# Altium PCB STM32.PcbDoc
Units mil, origin at the board's own origin, x right, y up, seen from the top; angles counter-clockwise.
Board outline 6000 x 4000 mil, 2 copper layers (Top Layer, Bottom Layer); 62 components, 102 nets, 332 pads, 38 vias.
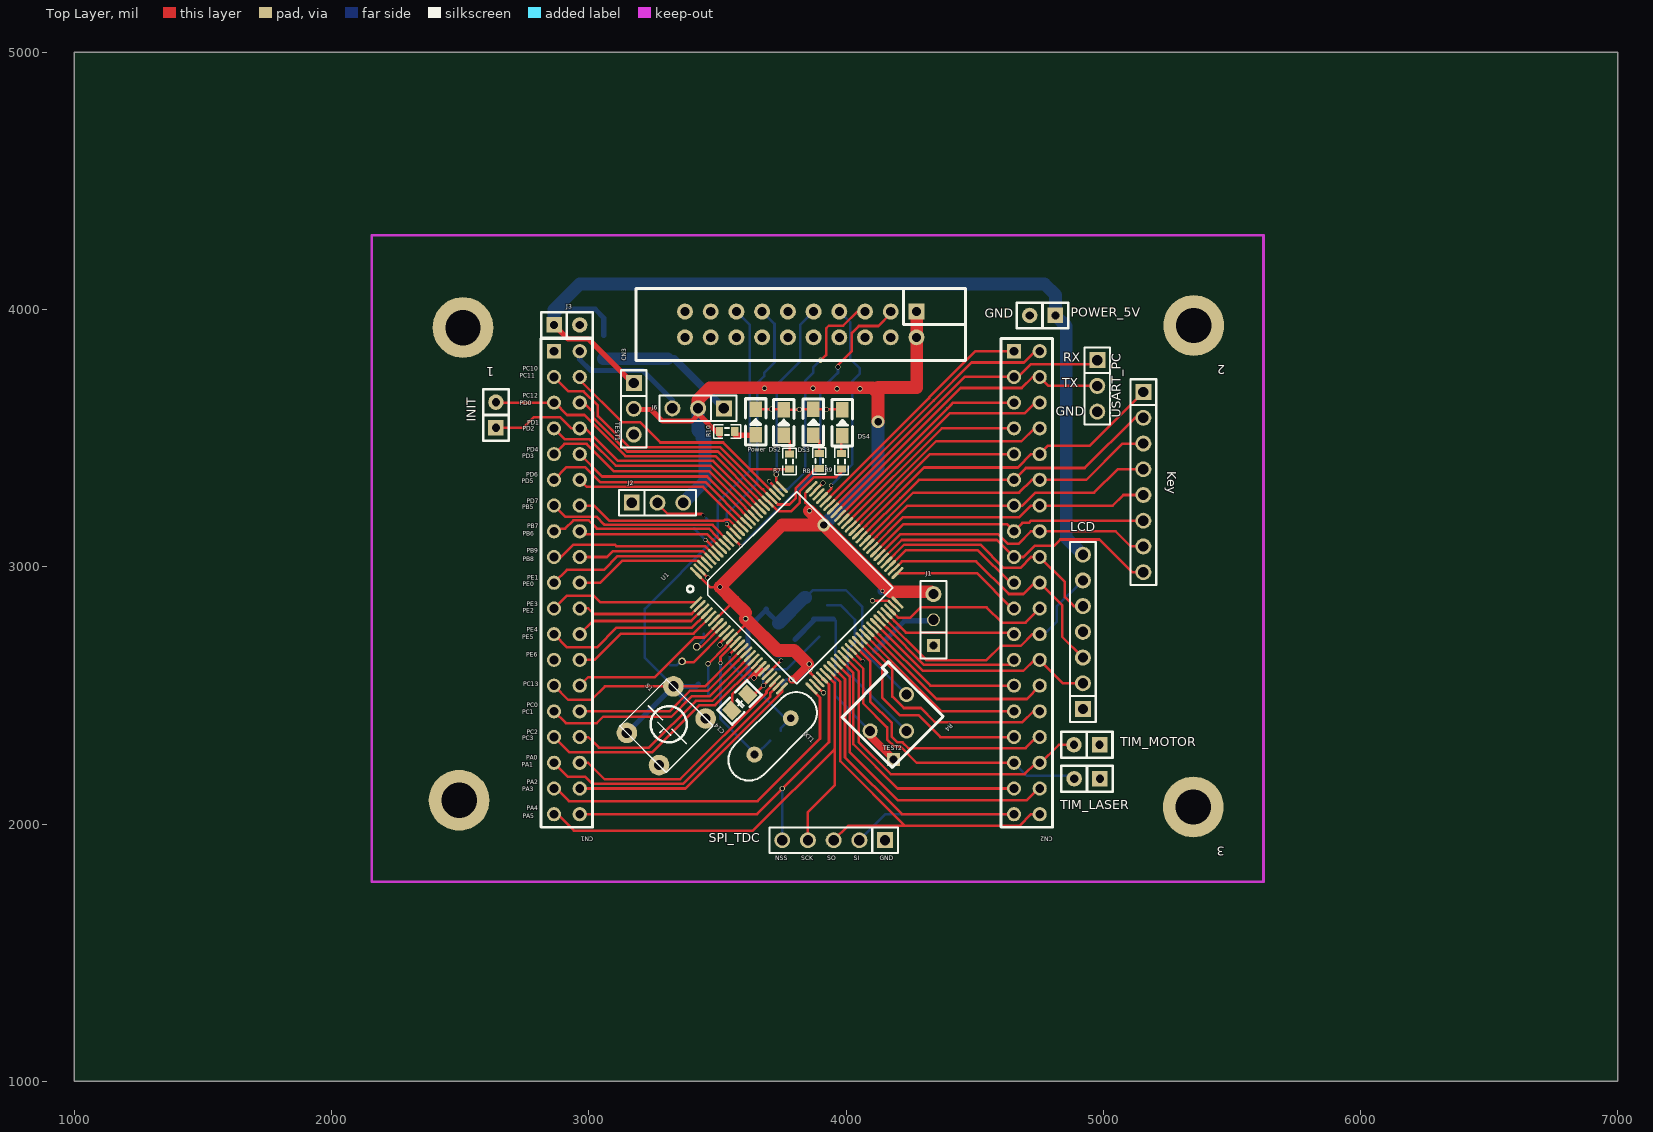
[diagram p0: Top Layer view]
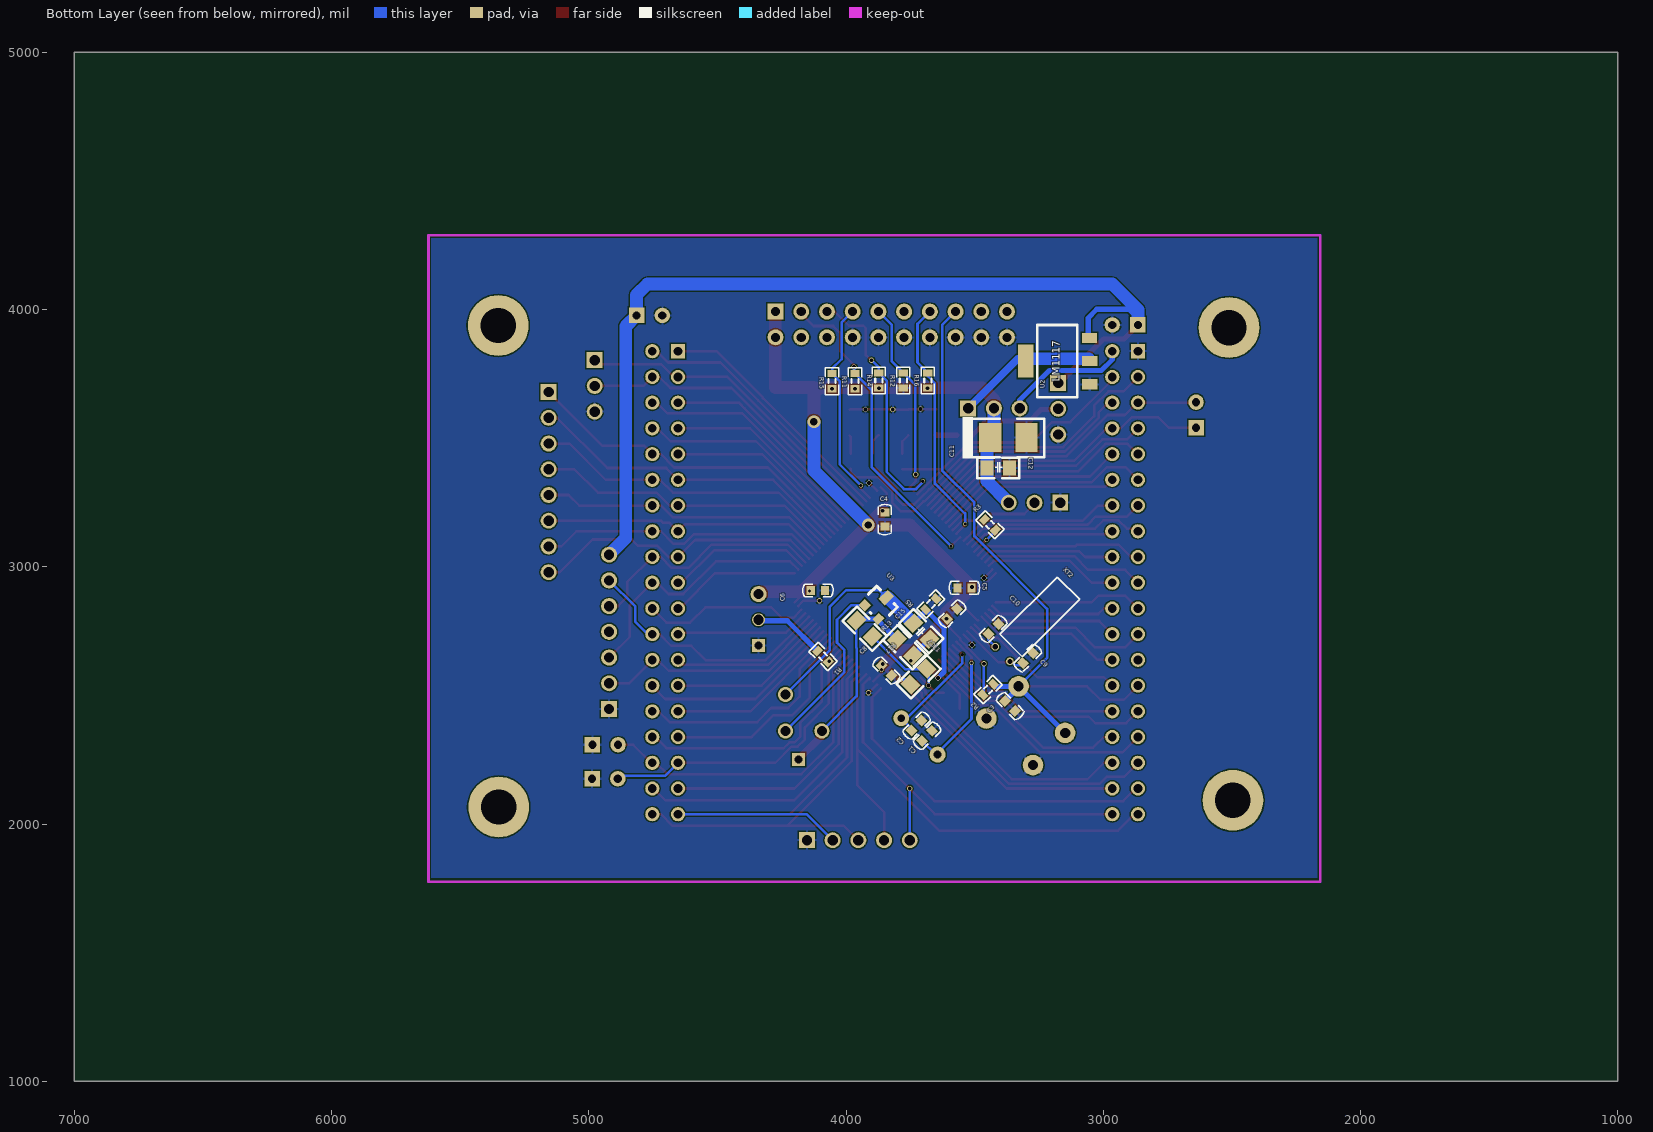
[diagram p1: Bottom Layer view, seen from below]

## Layer stack, top to bottom
Top Layer: signal copper 1.4
Dielectric: dielectric 12.6, FR-4, Dk 4.8
Bottom Layer: signal copper 1.4

## Board outline
1000,1000 7000,1000 7000,5000 1000,5000

## Design rules (kind name [scope] priority, off if disabled: settings)
Clearance [All] p1: gap=5
HoleToHoleClearance [All] p1: gap=6 allowstackedmicrovias=TRUE
MinimumSolderMaskSliver [All] p1: minsoldermaskwidth=6
PolygonConnect [All] p1: connectstyle=Relief reliefconductorwidth=10 reliefentries=4 polygonreliefangle="90 Angle"
RoutingVias [All] p1: holewidth=15 width=20 viastyle="Through Hole" minholewidth=13 minwidth=15 maxholewidth=28 maxwidth=50
SilkToSilkClearance [All] p1: silktosilkclearance=0
SilkscreenOverComponentPads [All] p1: minsilkscreentomaskgap=-10
SolderMaskExpansion [All] p1: expansion=4
TestPointUsage FabricationTestPointUsage [All] p1: valid=0 allowmultiple=FALSE
Testpoint FabricationTestpoint [All] p1: side=3 testpointundercomponent=TRUE minsize=40 maxsize=100 preferedsize=60 minholesize=0 maxholesize=40 preferedholesize=32 testpointgrid=1 style=297 order=0123456789
Width [All] p1: maxlimit=50 minlimit=10 preferedwidth=10
20 further rules are at their usual default settings.

## Components (designator, comment, footprint, x,y, rotation, side; value= is the part's Value field where it differs from the comment)
1 "" "gudingkong(3.5mm) - duplicate" 2511,3930 r180 top
2 "" "gudingkong(3.5mm) - duplicate" 5352,3938 r180 top
3 "" "gudingkong(3.5mm) - duplicate" 5350,2066 r180 top
C1 "20pF" 0603C 3662,2366 r315 bottom
C2 "20pF" 0603C 3703,2406 r315 bottom
C3 "100nF" 0603C 3339,2436 r45 bottom
C4 "100nF" 0603C 3849,3151 r90 bottom
C5 "100nF" 0603C 3572,2918 r180 bottom
C6 "100nF" 0603C 4077,2908 r0 bottom
C7 "100nF" 0603C 3565,2840 r315 bottom
C8 "100nF" 0603C 3820,2574 r45 bottom
C9 "10pF" 0603C 3316,2622 r135 bottom
C10 "10pF" 0603C 3450,2735 r135 bottom
C11 "100uF" 3528C(1210) 3439,3502.2 r0 bottom
C12 "10uF" 0805C 3450,3382 r180 bottom
C14 "10nF" 0805C 3615,2504 r225 top
C15 "10nF" 0805C 3676,2721 r45 bottom
CN1 "HEADER 19X2" DIP38 2865,3838 r270 top
CN2 "HEADER 19X2" DIP38 4653,3838 r270 top
CN3 "JTAG" IDC20_W 4274,3992 r180 top
DS2 "LED" 0805D 3758,3561 r90 top
DS3 "LED" 0805D 3873,3562 r90 top
DS4 "LED" 0805D 3986,3560 r90 top
INIT "SIP2" SIP2-2.54 2639,3540 r90 top
J1 "BOOT1" SIP3-2.54#1 4340,2693.82 r90 top
J2 "BOOT0" SIP3-2.54#2 3167.18,3249 r0 top
J3 "POWER" SIP2-2.54 2865,3940 r0 top locked
J6 "SIP3" SIP3-2.54#2 3525,3615.82 r180 top
Key "SIP8" SIP8-2.54 5156,3679 r270 top
L1 "" 0805R 3753.31,2538.29 r135 bottom
LCD "SIP7" SIP7-2.54 4804,2327 r90 top
Power "LED" 0805D 3649,3563 r90 top
POWER_5V "SIP2" SIP2-2.54 4814,3977 r180 top
R1 "10K" 0603R 4089,2651 r225 bottom
R2 "10K" 0603r 3448,2522.18 r315 bottom
R3 "10K" 0603r 3441,3164 r45 bottom
R4 "RPot_1" VR4B 4235.42,2503.28 r225 top
R5 "0" 0603r 3671,2854 r315 bottom
R7 "510" 0603R 3781,3410 r90 top
R8 "510" 0603R 3896,3412 r90 top
R9 "510" 0603R 3982,3411 r90 top
R10 "510" 0603R 3539,3526 r0 top
R11 "10K" 0603R 3965,3720.48 r270 bottom
R12 "10K" 0603R 3777.25,3725.48 r90 bottom
R13 "47" 0805R 3735,2651 r45 bottom
R14 "10K" 0603R 3872.5,3723.48 r270 bottom
R15 "10K" 0603R 4053.75,3720.48 r270 bottom
R16 "10K" 0603R 3682,3723.48 r270 bottom
R17 "39" 0805R 3963,2795 r225 bottom
S1 "SW-PB" KEY_4PIN 3273.19,2229 r45 top
SPI_TDC "SIP5" SIP5-2.54 4152,1937 r180 top
TEST1 "SIP3" SIP3-2.54#2 3175,3714 r270 top
TEST2 "SIP1" SIP1 4180,2251 r90 top
TIM_LASER "SIP2" SIP2-2.54 4987,2176 r180 top
TIM_MOTOR "SIP2" SIP2-2.54 4986,2308 r180 top
U1 "STM32F103VBH6" LQFP-100 3821,2924.28 r45 top
U2 "LM1117-3.3" lm1117 3176.5,3789.82 r90 bottom
U3 "TL431" SOT-23 3875.76,2969.28 r225 bottom
USART_PC "SIP3" SIP3-2.54#2 4977,3803 r270 top
XT1 "crastal" HC-49S 3644,2269.87 r45 top locked
XT2 "crastal" AT38 3362.81,2632.3 r135 bottom
? "" "gudingkong(3.5mm) - duplicate" 2496,2092 r180 top

## Footprints (in the part's own frame and the unit in brackets; to place one, negate y for a bottom-side part, rotate by r counter-clockwise, add the part's x,y. Pads: shape width x height; smd on the part's side, far side on the other; paste and mask are expansions set on the pad)
0603C [mm]
  rect 0.8x0.9 smd: 1(0.127,0) 2(1.527,0)
  silkscreen extent -0.69,-0.61 2.32,0.64, body extent -0.05,-0.48 1.7,0.47, height 0.85
0603R [mm]
  rect 0.7x0.9 smd: 1(-0.775,0) 2(0.725,0)
  silkscreen extent -1.35,-0.66 1.3,0.66, body extent -0.88,-0.48 0.82,0.48, height 0.6
0603r [mm]
  rect 0.7x0.9 smd: 1(-0.775,0) 2(0.725,0)
  silkscreen extent -1.35,-0.66 1.3,0.66, body extent -0.88,-0.48 0.82,0.48, height 0.6
0805C [mil]
  rect 51.21x59.06 smd: 1(-2,2) 2(86,2)
  silkscreen extent -39,-38 124,42
0805D [mil]
  rect 60x49.21 smd: A(-50,0) K(50,0)
  silkscreen extent -90,-40 90,40
0805R [mil]
  rect 51.21x59.06 smd: 1(6,0) 2(94,0)
  silkscreen extent -31,-40 132,40
3528C(1210) [mm]
  rect 2.2x2.85 smd: 1(0,0) 2(-3.581,0)
  silkscreen extent -5.33,-2.01 2.74,2.06
AT38 [mil] "直径为3mm，长度为8mm晶振"
  round 30 hole 20: 1(0,0) 2(0,80.31)
  silkscreen extent 45,-21 362,101
DIP38 [mil]
  rect 55x55 hole 34: 1(0,0)
  round 55 hole 34: 2(0,100) 3(100,0) 4(100,100) 5(200,0) 6(200,100) 7(300,0) 8(300,100) 9(400,0) 10(400,100) 11(500,0) 12(500,100) 13(600,0) 14(600,100) 15(700,0) 16(700,100) 17(800,0) 18(800,100) 19(900,0) 20(900,100) 21(1000,0) 22(1000,100) 23(1100,0) 24(1100,100) 25(1200,0) 26(1200,100) 27(1300,0) 28(1300,100) 29(1400,0) 30(1400,100) 31(1500,0) 32(1500,100) 33(1600,0) 34(1600,100) 35(1700,0) 36(1700,100) 37(1800,0) 38(1800,100)
  silkscreen extent -50,-50 1850,150
"gudingkong(3.5mm) - duplicate" [mm]
  round 6 hole 3.5: 0(0,0)
HC-49S [mil]
  round 62 hole 30: 1(0,0) 2(200,0)
  silkscreen extent -110,-80 310,80
IDC20_W [mil]
  rect 62x62 hole 35.43: 1(0,0)
  round 62 hole 35.43: 2(0,100) 3(100,0) 4(100,100) 5(200,0) 6(200,100) 7(300,0) 8(300,100) 9(400,0) 10(400,100) 11(500,0) 12(500,100) 13(600,0) 14(600,100) 15(700,0) 16(700,100) 17(800,0) 18(800,100) 19(900,0) 20(900,100)
  silkscreen extent -190,-90 1090,190
KEY_4PIN [mil]
  round 80 hole 40: 1(0,0) 1(256,0) 2(0,177) 2(256,177)
  silkscreen extent 0,-40 256,215
lm1117 [mm]
  rect 1x1.5 smd: 1(-2.043,-3.148) 2(0.256,-3.148) 3(2.53,-3.123)
  rect 3.3x1.549 smd: 4(0.254,3.175)
  silkscreen extent -3.3,-1.91 3.81,2.03
LQFP-100 [mil]
  rect 62x11.02 smd: 1(-330,241)
  oval 62x11.02 smd: 2(-330,221.32) 3(-330,201.63) 4(-330,181.95) 5(-330,162.26) 6(-330,142.57) 7(-330,122.89) 8(-330,103.2) 9(-330,83.52) 10(-330,63.83) 11(-330,44.15) 12(-330,24.46) 13(-330,4.78) 14(-330,-14.91) 15(-330,-34.59) 16(-330,-54.28) 17(-330,-73.96) 18(-330,-93.65) 19(-330,-113.33) 20(-330,-133.01) 21(-330,-152.7) 22(-330,-172.38) 23(-330,-192.07) 24(-330,-211.76) 25(-330,-231.44) 51(303.87,-231.44) 52(303.87,-211.76) 53(303.87,-192.07) 54(303.87,-172.38) 55(303.87,-152.7) 56(303.87,-133.01) 57(303.87,-113.33) 58(303.87,-93.65) 59(303.87,-73.96) 60(303.87,-54.28) 61(303.87,-34.59) 62(303.87,-14.91) 63(303.87,4.78) 64(303.87,24.46) 65(303.87,44.15) 66(303.87,63.83) 67(303.87,83.52) 68(303.87,103.2) 69(303.87,122.89) 70(303.87,142.57) 71(303.87,162.26) 72(303.87,181.95) 73(303.87,201.63) 74(303.87,221.32) 75(303.87,241)
  oval 11.02x62 smd: 26(-249.28,-312.16) 27(-229.6,-312.16) 28(-209.91,-312.16) 29(-190.23,-312.16) 30(-170.54,-312.16) 31(-150.86,-312.16) 32(-131.17,-312.16) 33(-111.49,-312.16) 34(-91.8,-312.16) 35(-72.12,-312.16) 36(-52.43,-312.16) 37(-32.75,-312.16) 38(-13.06,-312.16) 39(6.62,-312.16) 40(26.31,-312.16) 41(45.99,-312.16) 42(65.68,-312.16) 43(85.36,-312.16) 44(105.05,-312.16) 45(124.73,-312.16) 46(144.42,-312.16) 47(164.1,-312.16) 48(183.79,-312.16) 49(203.47,-312.16) 50(223.16,-312.16) 76(223.16,321.72) 77(203.47,321.72) 78(183.79,321.72) 79(164.1,321.72) 80(144.42,321.72) 81(124.73,321.72) 82(105.05,321.72) 83(85.36,321.72) 84(65.68,321.72) 85(45.99,321.72) 86(26.31,321.72) 87(6.62,321.72) 88(-13.06,321.72) 89(-32.75,321.72) 90(-52.43,321.72) 91(-72.12,321.72) 92(-91.8,321.72) 93(-111.49,321.72) 94(-131.17,321.72) 95(-150.86,321.72) 96(-170.54,321.72) 97(-190.23,321.72) 98(-209.91,321.72) 99(-229.6,321.72) 100(-249.28,321.72)
  silkscreen extent -321,-259 251,306
SIP1 [mil]
  rect 50x50 hole 30: 1(0,-5)
SIP2-2.54 [mil]
  rect 60x60 hole 32: 1(0,0)
  round 60 hole 32: 2(100,0)
  silkscreen extent -50,-50 150,50
SIP3-2.54#1 [mil]
  rect 50x50 hole 30: 1(0,0)
  round 50 hole 40: 2(100,0)
  round 62 hole 40: 3(200,0)
  silkscreen extent -50,-50 250,50
SIP3-2.54#2 [mil]
  rect 62x62 hole 40: 1(0,0)
  round 62 hole 40: 2(100,0) 3(200,0)
  silkscreen extent -50,-50 250,50
SIP5-2.54 [mil]
  rect 62x62 hole 40: 1(0,0)
  round 62 hole 40: 2(100,0) 3(200,0) 4(300,0) 5(400,0)
  silkscreen extent -50,-50 450,50
SIP7-2.54 [mil]
  rect 62x62 hole 40: 1(120,-117)
  round 62 hole 40: 2(220,-117) 3(320,-117) 4(420,-117) 5(520,-117) 6(620,-117) 7(720,-117)
  silkscreen extent 70,-167 770,-67
SIP8-2.54 [mil]
  rect 62x62 hole 40: 1(0,0)
  round 62 hole 40: 2(100,0) 3(200,0) 4(300,0) 5(400,0) 6(500,0) 7(600,0) 8(700,0)
  silkscreen extent -50,-50 750,50
SOT-23 [mil]
  rect 36x36 smd: 1(47.76,-120.28)
  rect 30x36 smd: 2(122.76,-120.28)
  rect 36x50 smd: 3(85.76,-40.28)
  silkscreen extent 28,-125 143,-35
VR4B [mm]
  round 1.5 hole 1: 1(0,0) 2(5.08,0) 3(2.54,2.54)
  silkscreen extent -1.02,-3.58 6.1,4.09

## Part data
C1 C2 C3 C4 C5 C6 C7 C8: library part Cap1, "SMD-CAP"
C9 C10: library part CAP, "Capacitor"
C11: library part Cap-T, "钽电容"
C12: library part "Cap Pol3", "Polarized Capacitor (Surface Mount)"
C14 C15: library part Cap, "Capacitor"
CN3: library part "Header 10X2", "Header, 10-Pin, Dual row"
INIT J6 Key LCD POWER_5V SPI_TDC TEST1 TIM_LASER TIM_MOTOR USART_PC: "jointbar"
J1 J2: library part SIP3, "jointbar"
J3: library part SIP2, "jointbar"
L1: library part L1
R1 R7 R8 R9 R10 R11 R12 R13 R14 R15 R16 R17: library part "RES Semi", "Resistor"
R2 R3 R5: library part res1, "Resistor"
R4: "Potentiometer"
S1: "Switch"
TEST2: "Variable Resistor"
U2: "800mA and 1A Low Dropout Positive Regulator 2.85V, 3.3V, 5V, and Adjustable"
U3: "IC"
XT1 XT2: library part XT, "晶振"

## Via types
v1: diameter 20, hole 15, Top Layer to Bottom Layer, 24 vias
v2: diameter 15, hole 13, Top Layer to Bottom Layer, 11 vias
v3: diameter 50, hole 28, Top Layer to Bottom Layer, 2 vias
v4: diameter 15, hole 13, Bottom Layer to Top Layer, 1 vias

## Nets (pads, with @x,y where several pads share a name; then routed paths per layer and width w, separated by ;. In a path a pad name is that pad's centre, name@x,y a point inside that pad or via, vN(x,y) a via of type N, cw(c..) or ccw(c..) an arc to the next point about the centre after c; other vN are vias at no path point)
+3V3: C4.2 C5.2 C6.2 C7.2 C8.2 C11.1 C12.1 CN3.1 CN3.2 J1.3 J2.3 J6.2 L1.1 R2.2 R10.1 R11.2 R14.2 R15.2 R16.2 TEST1.2 U1.6 U1.11 U1.28 U1.50 U1.75 U1.100 | length 5182.8
  Top Layer w10: U1.100 3471.72,2921 v1(3510,2921) ; v1(3464,2623) 3465.28,2623 3530,2687.72 3530,2689.82 3556.44,2716.26 U1.11 3621.14,2786.86 ; U1.6 3488.75,2791.75 3564,2867 ; v1(3858,3218) 3858,3233.27 3841.92,3249.35 3841.92,3286.03 U1.75 ; v2(3862,2599) 3862,2586.42 U1.28 ; 4154.87,2906 U1.50
  Top Layer w20: TEST1.2@3174,3611 3242,3611 3287,3566 3400,3566 J6.2@3425,3591 ; J6.2 3425,3595.47 R10.1@3509.47,3511
  Top Layer w30: v1(3788.86,2561.86) 3796.86,2561.86 v1(3857,2622)
  Top Layer w50: J6.2 3425,3649 3472,3696 4104,3696 4125,3675 ; v1(3610,2798) 3621.14,2786.86 3733,2675 3798,2675 v1@3851,2622 ; 3610,2821 3564,2867 v1(3510,2921) 3751.5,3162.5 v3(3913.5,3162.5) ; v1(3858,3218) v3(3913.5,3162.5) ; v3(4125,3564) 4125,3675 ; CN3.1@4275,3986 4275,3697 4125,3697 4125,3675 ; J1.3 4330.82,2903 4173,2903 v3(3913.5,3162.5)
  Bottom Layer w10: v1(3464,2623) 3464,2506.18 R2.2 ; L1.1 3768.4,2561.86 v1(3788.86,2561.86)
  Bottom Layer w30: C6.2@4137.12,2906 C6.2
  Bottom Layer w50: J2.3 3452,3333.82 C12.1 3452,3489.2 C11.1 ; J6.2 3425,3529.2 C11.1@3453,3501.2 ; v3(3913.5,3162.5) 4124,3373 v3@4124,3563
  other v1: 3965,3691.95 4053.75,3691.95 3683,3694 3872,3694
  other v2: 4142,2906
+5V: J3.1 LCD.7 POWER_5V.1 TEST1.1 U2.3 | length 3815.9
  Top Layer w20: J3.1 2919.5,3885.5 2999.5,3885.5 TEST1.1@3174,3711
  Bottom Layer w20: J3.1 2865,3966 2900,4001 3025,4001 3058.53,3967.47 U2.3@3058.53,3898.44
  Bottom Layer w50: J3.1@2865,3966 2865,3999 2965,4099 4772,4099 4814,4057 POWER_5V.1 4856,3935 4856,3112 LCD.7
AREF_IN: R4.2 R13.2 R17.1 TEST2.1 U3.2 | length 829.6
  Top Layer w30: R4.2 4094,2342 TEST2.1
  Bottom Layer w10: R17.1@3952.09,2797.43 R17.1 3960,2789.51 3960,2685 3959,2684 3959,2496.86 R4.2
  Bottom Layer w20: R13.2 U3.2@3877.72,2793.72 ; U3.2 R17.1@3952.09,2797.43
EVCC: CN3.19
GND: C1.1 C2.1 C3.1 C4.1 C5.1 C6.1 C7.1 C8.1 C9.2 C10.2 C11.2 C12.2 CN1.1 CN3.8 CN3.10 CN3.12 CN3.14 CN3.16 CN3.18 CN3.20 DS2.K DS3.K DS4.K J1.1 J2.1 J3.2 LCD.1 Power.K POWER_5V.2 R5.1 R12.1 S1.1 SPI_TDC.1 TEST1.3 TIM_LASER.1 TIM_MOTOR.1 U1.10 U1.27 U1.49 U1.74 U1.99 U2.1 USART_PC.3 | length 619.8
  Top Layer w10: U1.99 3463.58,2957 v1(3464,2957) ; v1(3510,2696) 3510,2703.56 U1.10 ; Power.K v1(3710,3613) 3756,3613 DS2.K v1(3818,3611) 3819,3612 DS3.K v1(3924,3612) 3984,3612 DS4.K ; U1.27 3880.79,2541.21 v1(3912,2510) ; U1.74 3909.73,3326 v1(3911,3326) ; v1(4103,2868) 4165.04,2868 U1.49
NetC1_2: C1.2 U1.12 XT1.1 | length 596
  Top Layer w10: v2(3512,2626) 3512,2648.5 3551.82,2688.32 3551.82,2689.82 3570.24,2708.24 U1.12
  Bottom Layer w10: v2(3512,2626) 3512,2408.77 3650.89,2269.87 C1.2
NetC15_1: C15.1 R13.1 U1.21 | length 163.2
  Top Layer w10: U1.21 3747.67,2635 v2(3748,2635)
  Bottom Layer w20: C15.1 3676.31,2718.17 R13.1
NetDS2_A: DS2.A R7.2 | length 82
  Top Layer w10: DS2.A 3781,3488 R7.2
NetDS3_A: DS3.A R8.2 | length 81
  Top Layer w10: DS3.A 3896,3489 R8.2
NetDS4_A: DS4.A R9.2 | length 72.1
  Top Layer w10: R9.2 3982,3506 DS4.A
NetJ1_2: J1.2 R1.1 | length 279.6
  Bottom Layer w20: R1.1 4228,2790 4336.18,2790 J1.2
NetJ2_2: J2.2 R3.2 | length 233.8
  Top Layer w10: J2.2 3267.18,3244.82 3307,3205 3440,3205 v2(3445,3200)
  Bottom Layer w10: J2.2@3264.18,3229.82 3267.18,3226.82 J2.2 ; R3.2@3456.34,3189 R3.2
NetJ6_1: J6.1 U2.2 U2.4 | length 547.4
  Bottom Layer w30: U2.4@3306.5,3808.82 3332,3808.82 J6.1
  Bottom Layer w50: U2.2@3057.55,3808.9 3306.42,3808.9 U2.4@3306.5,3808.82
NetPower_A: Power.A R10.2 | length 81.3
  Top Layer w20: R10.2@3568.53,3511 3647,3511 Power.A
NetR3_1: R3.1 U1.94 | length 130.3
  Top Layer w10: v2(3453.22,3104) 3455.78,3104 U1.94
  Bottom Layer w10: R3.1@3410.41,3150.41 3410.41,3146.81 v2(3453.22,3104)
NetR4_3: R4.3 U3.1 | length 670.5
  Bottom Layer w10: U3.1 3978.54,2850.46 4035,2794 4035,2705 4006,2676 4006,2591.28 R4.3
OSC_OUT: C2.2 U1.13 XT1.2 | length 474
  Top Layer w10: v2(3548,2658) U1.13
  Bottom Layer w10: v2(3548,2658) 3548,2626 3762.71,2411.29 XT1.2 3745.51,2371.38 C2.2
PA0: CN1.34 U1.23 | length 950.3
  Top Layer w10: CN1.34 2998,2238 3062,2174 3355,2174 3691,2510 3691,2516.75 3723.47,2549.22 U1.23
PA1: CN1.33 U1.24 | length 1077.6
  Top Layer w10: CN1.33@2865,2241 CN1.33 2920,2183 2987,2183 3014,2156 3367,2156 3706,2495 3706,2509.82 U1.24
PA2: CN1.36 U1.25 | length 955.7
  Top Layer w10: CN1.36 3376,2138 3751.31,2513.31 U1.25
PA3: CN1.35 U1.26 | length 1364.1
  Top Layer w10: CN1.35 2874,2138 2923,2089 3656,2089 3899,2332 3899,2491.89 3865.46,2525.43 U1.26
PA4: CN1.38 SPI_TDC.5 U1.29 | length 1579
  Top Layer w10: CN1.38 3654,2038 3934,2318 3934,2542.26 U1.29 U1.29@3907.22,2563.14
  Bottom Layer w10: SPI_TDC.5@3727,1937 SPI_TDC.5 v1(3752,2138)
PA5: CN1.37 SPI_TDC.4 U1.30 | length 1950.6
  Top Layer w10: CN1.37 2878,2038 2942,1974 3638,1974 3954.5,2290.5 ; SPI_TDC.4 3852,2046 3956,2150 3956,2548.1 U1.30
PA6: CN2.38 SPI_TDC.3 U1.31 | length 1548.2
  Top Layer w10: U1.31@3948,2582 3978,2552 3978,2244 4229,1993 ; SPI_TDC.3 4008,1993 4229,1993 ; CN2.38 4720,2038 4675,1993 4229,1993
PA7: CN2.37 SPI_TDC.2 U1.32 | length 1762.7
  Top Layer w10: U1.32 3996,2563.78 3996,2259 4217,2038 CN2.37
  Bottom Layer w10: SPI_TDC.2 4153,2038 CN2.37
PA8: CN2.5 U1.67 | length 858.4
  Top Layer w10: U1.67 4394.6,3616 4408.3,3629.7 4416.6,3638 CN2.5
PA9: CN2.4 U1.68 USART_PC.2 | length 1246.4
  Top Layer w10: U1.68 4445.76,3695 4683,3695 4726,3738 CN2.4 4788,3703 USART_PC.2
PA10: CN2.3 U1.69 USART_PC.1 | length 1267
  Top Layer w10: U1.69 4358.92,3636 4404.46,3681.54 4460.92,3738 CN2.3 4669,3738 4719,3788 4962,3788 USART_PC.1
PA11: CN2.2 U1.70 | length 1065.3
  Top Layer w10: U1.70 4341.08,3646 ; 4341.08,3646.8 4488.28,3794 4692,3794 4736,3838 CN2.2
PA12: CN2.1 U1.71 | length 973.3
  Top Layer w10: U1.71 4323.25,3656 ; 4323.25,3657.25 4504,3838 CN2.1
PA13: CN3.7 R15.1 U1.72 | length 817.9
  Top Layer w10: U1.72 3942,3302.59 v2(3942,3316)
  Bottom Layer w10: v2(3942,3316) 4024.5,3398.5 4024.5,3721.76 R15.1 4053.75,3770 4017,3806.75 4017,3949 CN3.7
PA14: CN3.9 R12.2 U1.76 | length 751.7
  Top Layer w10: v1(3729,3359) 3729,3331.87 U1.76
  Bottom Layer w10: v1(3729,3359) 3730,3360 3730,3706.76 R12.2 3822,3798.76 3822,3940 CN3.9
PA15: CN3.5 R14.1 U1.77 | length 1007
  Top Layer w10: v2(3701,3333) 3737.39,3296.61 U1.77 ; v1(3901,3803) 3903,3803 3923,3823 3923,3927 3933,3937 3989,3937 4044,3992 CN3.5
  Bottom Layer w10: v2(3701,3333) 3701,3329 3728,3302 3775,3302 3842.38,3369.38 3842.38,3723.89 R14.1 3872.5,3774.5 v1(3901,3803)
PB0: CN2.34 TIM_MOTOR.2 U1.35 | length 1303
  Top Layer w10: U1.35@3990.73,2650.27 U1.35 4049,2594.29 4049,2319 4174,2194 4694,2194 4734,2234 CN2.34@4753,2234 ; CN2.34@4760,2234 CN2.34@4753,2234 ; TIM_MOTOR.2 4827,2308 CN2.34@4753,2234
PB1: CN2.33 TIM_LASER.2 U1.36 | length 1192.2
  Top Layer w10: U1.36 4067,2604.13 4067,2469 4160,2376 4160,2329 4188.55,2300.45 4212.55,2300.45 4275,2238 CN2.33
  Bottom Layer w10: CN2.33 4704,2187 4876,2187 TIM_LASER.2
PB2: R1.2 U1.37 | length 66.6
  Top Layer w10: U1.37 4065,2633.97 v2(4065,2633)
PB3: CN3.13 R16.1 U1.89 | length 974.9
  Top Layer w10: v2(3537,3166) 3537,3161.97 U1.89
  Bottom Layer w10: v2(3537,3166) 3537,3208 3539,3208 3654.28,3323.28 3654.28,3712.88 3682,3740.59 R16.1 3722,3794.01 3722,3944 CN3.13
PB4: CN3.3 R11.1 U1.90 | length 1253.2
  Top Layer w10: U1.90 3591.13,3080 v4(3592,3080) ; v1(3969,3776) 3969,3784 4023,3838 4023,3909 4050,3936 4126,3936 4174,3984 CN3.3
  Bottom Layer w10: v4(3592,3080) 3900.61,3388.61 3900.61,3686.62 R11.1 3969,3755.01 v1(3969,3776) v1@3965,3772
PB5: CN1.13 U1.91 | length 733.9
  Top Layer w10: CN1.13 2908,3195 3030,3195 3060,3165 ; 3060,3163 3481,3163 3511,3133 3511,3132.29 U1.91
PB6: CN1.15 U1.92 | length 719.6
  Top Layer w10: CN1.15 2875,3148 2908,3148 2940,3180 3000,3180 3032,3148 3467,3148 3496.55,3118.45 3497,3118.45 U1.92
PB7: CN1.16 U1.93 | length 569
  Top Layer w10: CN1.16 2977,3126 3461,3126 3482.39,3104.61 3483,3104.61 U1.93@3509,3078
PB8: CN1.17 U1.95 | length 658.7
  Top Layer w10: CN1.17 2892,3038 2940,3086 3101.57,3086 3108.57,3079 3452.94,3079 U1.95
PB9: CN1.18 U1.96 | length 529.8
  Top Layer w10: CN1.18 3070.79,3038 3093.79,3061 3443.1,3061 U1.96
PB10: CN2.23 U1.47 | length 529.7
  Top Layer w10: U1.47 4183.18,2794.18 4189,2788.36 4188.64,2788.36 4233,2744 4647,2744 CN2.23
PB11: CN2.22 U1.48 | length 656
  Top Layer w10: U1.48@4174,2833 4203,2802.2 4250.2,2802.2 4290,2842 4547,2842 4606,2783 4698,2783 CN2.22
PB12: CN2.21 U1.51 | length 510.4
  Top Layer w10: U1.51 4508.5,2975.5 4646,2838 CN2.21
PB13: CN2.20 LCD.3 U1.52 | length 1011.7
  Top Layer w10: U1.52 4217,3020.82 4506.18,3020.82 4633,2894 4690,2894 4734,2938 CN2.20 4840,2851 4840,2728 LCD.3
PB14: CN2.19 U1.53 | length 559.5
  Top Layer w10: U1.53 4233.34,3065 4512,3065 4639,2938 CN2.19
PB15: CN2.18 LCD.5 U1.54 | length 959.5
  Top Layer w10: U1.54 4226.51,3086 4522,3086 4612,2996 4678,2996 4720,3038 CN2.18 4851,2940 4851,2882 4886,2847 LCD.5
PC0: CN1.30 U1.15 | length 741.8
  Top Layer w10: CN1.30 3313,2438 3393,2518 3463,2518 3580.37,2635.37 3581,2635.37 U1.15
PC1: CN1.29 U1.16 | length 888.3
  Top Layer w10: CN1.29 2911,2392 3031,2392 3056,2417 3321,2417 3401,2497 3471,2497 3595,2621 3595,2621.53 U1.16
PC2: CN1.32 U1.17 | length 833.4
  Top Layer w10: CN1.32 2998,2338 3039,2297 3234,2297 3416.02,2479.02 3480.02,2479.02 3608.69,2607.69 3609,2607.69 U1.17
PC3: CN1.31 U1.18 | length 956.5
  Top Layer w10: CN1.31 2924,2279 3247,2279 3430.02,2462.02 3491.17,2462.02 U1.18
PC4: CN2.36 U1.33 | length 1201.8
  Top Layer w10: U1.33 4014,2573.61 4014,2280 4202,2092 4702,2092 4748,2138 CN2.36
PC5: CN2.35 U1.34 | length 1045.5
  Top Layer w10: U1.34 4028.29,2587.17 4028.29,2580.54 4029,2579.83 4029,2310 4201,2138 CN2.35
PC6: CN2.9 U1.63 | length 743.5
  Top Layer w10: U1.63 4064,3174.04 4064,3175 4327,3438 CN2.9
PC7: CN2.8 U1.64 | length 892.5
  Top Layer w10: U1.64 4350.12,3488 4682,3488 4732,3538 CN2.8
PC8: CN2.7 U1.65 | length 800.6
  Top Layer w10: U1.65 4372.28,3538 CN2.7
PC9: CN2.6 U1.66 | length 950.2
  Top Layer w10: U1.66 4403.44,3597 4695,3597 4736,3638 CN2.6
PC10: CN1.4 R7.1 U1.78 | length 1104.5
  Top Layer w10: CN1.4 2965,3726 3129,3562 3199,3562 3278,3483 3522.2,3483 U1.78 ; 3631,3379.47 R7.1
PC11: CN1.3 R8.1 U1.79 | length 1341.5
  Top Layer w10: CN1.3 2921,3682 2980,3682 3035,3627 3035,3586 3156,3465 3511,3465 3675,3301 3678,3301 3678,3299.36 U1.79 3735.36,3242 3780,3242 3804,3266 3804,3304 3881.47,3381.47 R8.1
PC12: CN1.6 R9.1 U1.80 | length 1306.4
  Top Layer w10: CN1.6 2980,3638 3018,3600 3018,3578.96 3148.96,3448 3501.52,3448 U1.80 3699.11,3253.89 3738,3215 3786.36,3215 3821,3249.64 3821,3294.12 3874.98,3348.1 3962,3348.1 3982,3368.1 R9.1
PC13: CN1.28 U1.7 | length 631.8
  Top Layer w10: CN1.28 2998,2571 3257,2571 3411,2725 3450,2725 U1.7@3499,2774
PC14: C10.1 U1.8 XT2.2 | length 193.2
  Top Layer w10: XT2.2 3438.09,2689.09 3512.92,2763.92 U1.8
  Bottom Layer w10: XT2.2 3446.46,2715.95 C10.1 C10.1@3446.46,2731.95
PC15: C9.1 U1.9 XT2.1 | length 272.8
  Top Layer w10: XT2.1@3362.81,2642.3 3375.47,2629.63 3408.23,2629.63 U1.9
  Bottom Layer w10: C9.1@3316,2617 3340.93,2617 XT2.1@3360.02,2636.09
PD0: CN1.5 INIT.2 U1.81 | length 1208.6
  Top Layer w10: INIT.2 2641,3638 CN1.5 2868,3638 2916,3590 2982.92,3590 3142.92,3430 3492,3430 3650,3272 3650,3271.68 U1.81
PD1: CN1.8 INIT.1 U1.82 | length 1194.3
  Top Layer w10: INIT.1 2745,3540 2787,3582 2888,3582 2932,3538 CN1.8 2988,3538 3114,3412 3483,3412 3636,3259 3636,3257.84 U1.82
PD2: CN1.7 U1.83 | length 923.9
  Top Layer w10: CN1.7 2908.09,3494.91 3003.05,3494.91 3104.96,3393 3473,3393 U1.83
PD3: CN1.9 U1.84 | length 908.4
  Top Layer w10: CN1.9 2904.91,3477.91 2992.09,3477.91 3099,3371 3469,3371 3609,3231 3609,3229.17 U1.84
PD4: CN1.10 U1.85 | length 766.5
  Top Layer w10: CN1.10 3052,3351 3460,3351 3595,3216 3595,3215.33 U1.85
PD5: CN1.11 U1.86 | length 859.1
  Top Layer w10: CN1.11@2865,3340 CN1.11 2914,3387 2986,3387 3044,3329 3453.49,3329 U1.86
PD6: CN1.12 U1.87 | length 708.6
  Top Layer w10: CN1.12 2992.16,3310.84 3444.16,3310.84 3511,3244 3511,3243.65 U1.87
PD7: CN1.14 U1.88 | length 663.1
  Top Layer w10: CN1.14 3020,3238 3079,3179 3525.25,3179 3529.75,3183.5 3544.25,3183.5 3584.28,3143.47 U1.88
PD8: CN2.17 Key.8 U1.55 | length 1150.4
  Top Layer w10: U1.55 4216.67,3104 4587,3104 CN2.17 4690,3038 4733.5,3081.5 4808.5,3081.5 4833,3106 4985,3106 5112,2979 Key.8
PD9: CN2.16 Key.7 U1.56 | length 1120.5
  Top Layer w10: U1.56 4211.83,3127 4591,3127 4629,3089 4670,3089 4719,3138 CN2.16 5048,3138 5107,3079 Key.7
PD10: CN2.15 Key.6 U1.57 | length 1112.9
  Top Layer w10: U1.57 4147,3090.01 4223,3166 4625,3166 CN2.15 4686,3171 4711,3171 4719,3179 Key.6
PD11: CN2.14 Key.5 U1.58 | length 1139.3
  Top Layer w10: U1.58 4222.15,3193 4674,3193 4719,3238 CN2.14 5037,3238 5078,3279 Key.5
PD12: CN2.13 Key.4 U1.59 | length 1189
  Top Layer w10: U1.59 4119,3117.69 4119,3118 4239,3238 CN2.13 4686,3238 4736,3288 4965,3288 5056,3379 Key.4
PD13: CN2.12 Key.3 U1.60 | length 1238.4
  Top Layer w10: U1.60 4261.47,3288 4673,3288 4723,3338 CN2.12 4934,3338 5075,3479 Key.3
PD14: CN2.11 Key.2 U1.61 | length 1288.4
  Top Layer w10: U1.61 4092,3146.37 4211.32,3265.68 4283,3337.37 4283,3338 CN2.11 4699,3384 4928,3384 5123,3579 Key.2
PD15: CN2.10 Key.1 U1.62 | length 1337.6
  Top Layer w10: U1.62 4078,3160.21 4078.21,3160.21 4304,3386 4668,3386 4720,3438 CN2.10 4786,3471 4948,3471 Key.1
PE0: CN1.19 U1.97 | length 646.5
  Top Layer w10: CN1.19 2915,2988 3059,2988 3112,3041 3435.26,3041 U1.97
PE1: CN1.20 U1.98 | length 523.4
  Top Layer w10: CN1.20 3045,2938 3129.96,3022.96 3425.47,3022.96 U1.98
PE2: CN1.21 U1.1 | length 583.2
  Top Layer w10: CN1.21 2914,2887 3020,2887 3045.65,2861.35 U1.1
PE3: CN1.22 U1.2 | length 488.1
  Top Layer w10: CN1.22 2998,2838 3019.73,2816.27 3400,2816.27 U1.2
PE4: CN1.24 U1.3 | length 519.6
  Top Layer w10: CN1.24 3016.11,2789.11 3397.89,2789.11 3442.3,2833.51 U1.3
PE5: CN1.23 U1.4 | length 670
  Top Layer w10: CN1.23 2916,2687 3032,2687 3108,2763 3401,2763 3426.59,2788.59 3428,2788.59 U1.4
PE6: CN1.26 U1.5 | length 577.4
  Top Layer w10: CN1.26 3023,2638 3125,2740 3407.25,2740 U1.5
PE7: CN2.32 U1.38 | length 1031.6
  Top Layer w10: U1.38 4094,2632.81 4094,2476 4178,2392 4178,2339 4199.55,2317.45 4219.59,2317.45 4242.04,2295 4698,2295 4741,2338 CN2.32 CN2.32@4748,2338
PE8: CN2.31 U1.39 | length 831.8
  Top Layer w10: U1.39 4140.32,2614.32 4140.32,2491.68 4210,2422 4283,2422 4367,2338 CN2.31
PE9: CN2.30 U1.40 | length 907.7
  Top Layer w10: U1.40 4060.84,2722.16 4180,2603 4180,2495.76 4224.88,2450.88 ; 4226.29,2452.29 4227.71,2450.88 4291.12,2450.88 4345,2397 4345,2396 4686,2396 4728,2438 CN2.30
PE10: CN2.29 U1.41 | length 702.4
  Top Layer w10: U1.41 4106,2704.33 4106,2704 4372,2438 CN2.29
PE11: CN2.28 U1.42 | length 796.9
  Top Layer w10: U1.42 4352.17,2486 4703,2486 4753,2536 CN2.28
PE12: CN2.27 U1.43 | length 644.5
  Top Layer w10: U1.43 4133,2733 4328,2538 CN2.27
PE13: CN2.26 LCD.2 U1.44 | length 936.2
  Top Layer w10: U1.44 4298.84,2595 4689,2595 4732,2638 CN2.26 4844,2547 LCD.2
PE14: CN2.25 U1.45 | length 604.4
  Top Layer w10: U1.45 4144.34,2777.34 4161,2760.68 4161,2762 4304,2619 4634,2619 CN2.25
PE15: CN2.24 LCD.6 U1.46 | length 1010
  Top Layer w10: U1.46 4312.52,2637 4546,2637 4602,2693 4680,2693 4725,2738 CN2.24
  Bottom Layer w10: CN2.24 4771,2738 4819,2786 4819,2845 LCD.6
POWER_IN_3.3V: CN1.2 J6.3 | length 489.7
  Bottom Layer w20: CN1.2 2965,3805.18 3006.59,3763.59 3208.63,3763.59 3325,3647.21 J6.3
RESET#: C3.2 CN1.27 CN3.15 R2.1 S1.2 U1.14 | length 2964.6
  Top Layer w10: CN1.27 2920,2483 3011,2483 3063.18,2535.18 3329.05,2535.18 3406.43,2535.18 3406.61,2535 3453,2535 3453,2536 3550,2633 ; 3551.79,2634 U1.14
  Bottom Layer w10: S1.2@3329.05,2535.18 3218.44,2645.79 3218.44,2836.44 3501,3119 3501,3249 3626,3374 3626,3940 CN3.15
  Bottom Layer w20: S1.2@3148.03,2354.16 S1.2@3329.05,2535.18 ; C3.2 3329.05,2530.97 S1.2@3329.05,2535.18 ; R2.1 3417.83,2535.18 S1.2@3329.05,2535.18
SGND: C14.2 C15.2 R4.1 R5.2 U1.19 U1.20 U3.3 | length 1466.5
  Top Layer w10: C14.2@3558.6,2448.77 3558.6,2504.68 3664.73,2610.8 U1.19 U1.20
  Top Layer w20: v1(3643,2567) 3643,2575 3665,2597
  Bottom Layer w10: U3.3 3872.44,2909 3999,2909 4063,2845 4063,2675.7 R4.1
  Bottom Layer w20: v1(3643,2567) 3619,2591 3619,2761.66 R5.2@3690.17,2832.83 ; R5.2@3690.17,2834.83 3690.17,2833.83 R5.2@3690.17,2832.83 ; R5.2 R5.2@3690.17,2832.83 ; C15.2 3690.17,2828.45 R5.2@3690.17,2832.83
  Bottom Layer w50: C15.2 3837.99,2880.16 U3.3
VBAT: CN1.25
VDDA: C14.1 L1.2 R17.2 U1.22 | length 447.8
  Top Layer w10: C14.1@3620.83,2511 3651.51,2511 v1(3678.75,2538.25) U1.22 U1.22@3709.55,2567.72
  Bottom Layer w10: v1(3678.75,2538.25) 3678.75,2596.67 L1.2 3690.34,2601.26 3769.26,2601.26 R17.2
pads on no net: 1.0 2.0 3.0 ?.0 CN3.4 CN3.6 CN3.11 CN3.17 LCD.4 U1.73

## Polygon pours and split planes (outlines as drawn)
GND on Bottom Layer "Top Layer-No Net" (solid, remove dead copper, pour order 1000): 2157,4279 2157,1791 5623,1791 5623,4288

## Keep-outs
Keep-Out Layer:
  lines w10: 2157,1776 5623,1776 5623,4288 2157,4288 2157,1776

## Silkscreen, mask and mechanical layers (free items; w line width, h text height)
Top Overlay:
  text "GND" at 4539,3957 h60
  text "RX" at 4845,3785 h60
  text "PC10" at 2743,3757 h30
  text "PC11" at 2732,3729 h30
  text "TX" at 4841,3686 h60
  text "PC12" at 2744,3651 h30
  text "PD0" at 2731,3623 h30
  text "GND" at 4815,3575 h60
  text "PD1" at 2761,3546 h30
  text "PD2" at 2743,3523 h30
  text "PD4" at 2759,3441 h30
  text "PD3" at 2741,3416 h30
  text "PD6" at 2757,3345 h30
  text "PD5" at 2740,3319 h30
  text "PD7" at 2758,3242 h30
  text "PB5" at 2741,3217 h30
  text "PB7" at 2760,3143 h30
  text "PB6" at 2744,3115 h30
  text "PB9" at 2759,3048 h30
  text "PB8" at 2744,3015 h30
  text "PE1" at 2760,2943 h30
  text "PE0" at 2743,2918 h30
  text "PE3" at 2759,2841 h30
  text "PE2" at 2743,2816 h30
  text "PE4" at 2759,2741 h30
  text "PE5" at 2741,2713 h30
  text "PE6" at 2757,2645 h30
  text "PC13" at 2745,2529 h30
  text "PC0" at 2758,2449 h30
  text "PC1" at 2741,2421 h30
  text "PC2" at 2758,2343 h30
  text "PC3" at 2742,2319 h30
  text "PA0" at 2757,2244 h30
  text "PA1" at 2740,2217 h30
  text "PA2" at 2758,2149 h30
  text "PA3" at 2741,2122 h30
  text "PA4" at 2759,2048 h30
  text "PA5" at 2743,2017 h30
  text "NSS" at 3725,1854 h30
  text "SCK" at 3826.5,1854 h30
  text "SO" at 3928,1854 h30
  text "SI" at 4029.5,1854 h30
  text "GND" at 4131,1854 h30

## Text inside footprints (layer, text, board x,y; h text height)
U2: Bottom Overlay "LM1117" at 3168.63,3718.95 h30 r270